# Altium PCB FRONT_v1.PcbDoc (part 2 of 5)
Units mm, origin at the board's own origin, x right, y up, seen from the top; angles counter-clockwise.
Board outline 100 x 68 mm, 4 copper layers (Top Layer, Layer 1, Layer 2, Bottom Layer), stack 1.484 mm thick; 320 components, 276 nets, 1432 pads, 1421 vias.
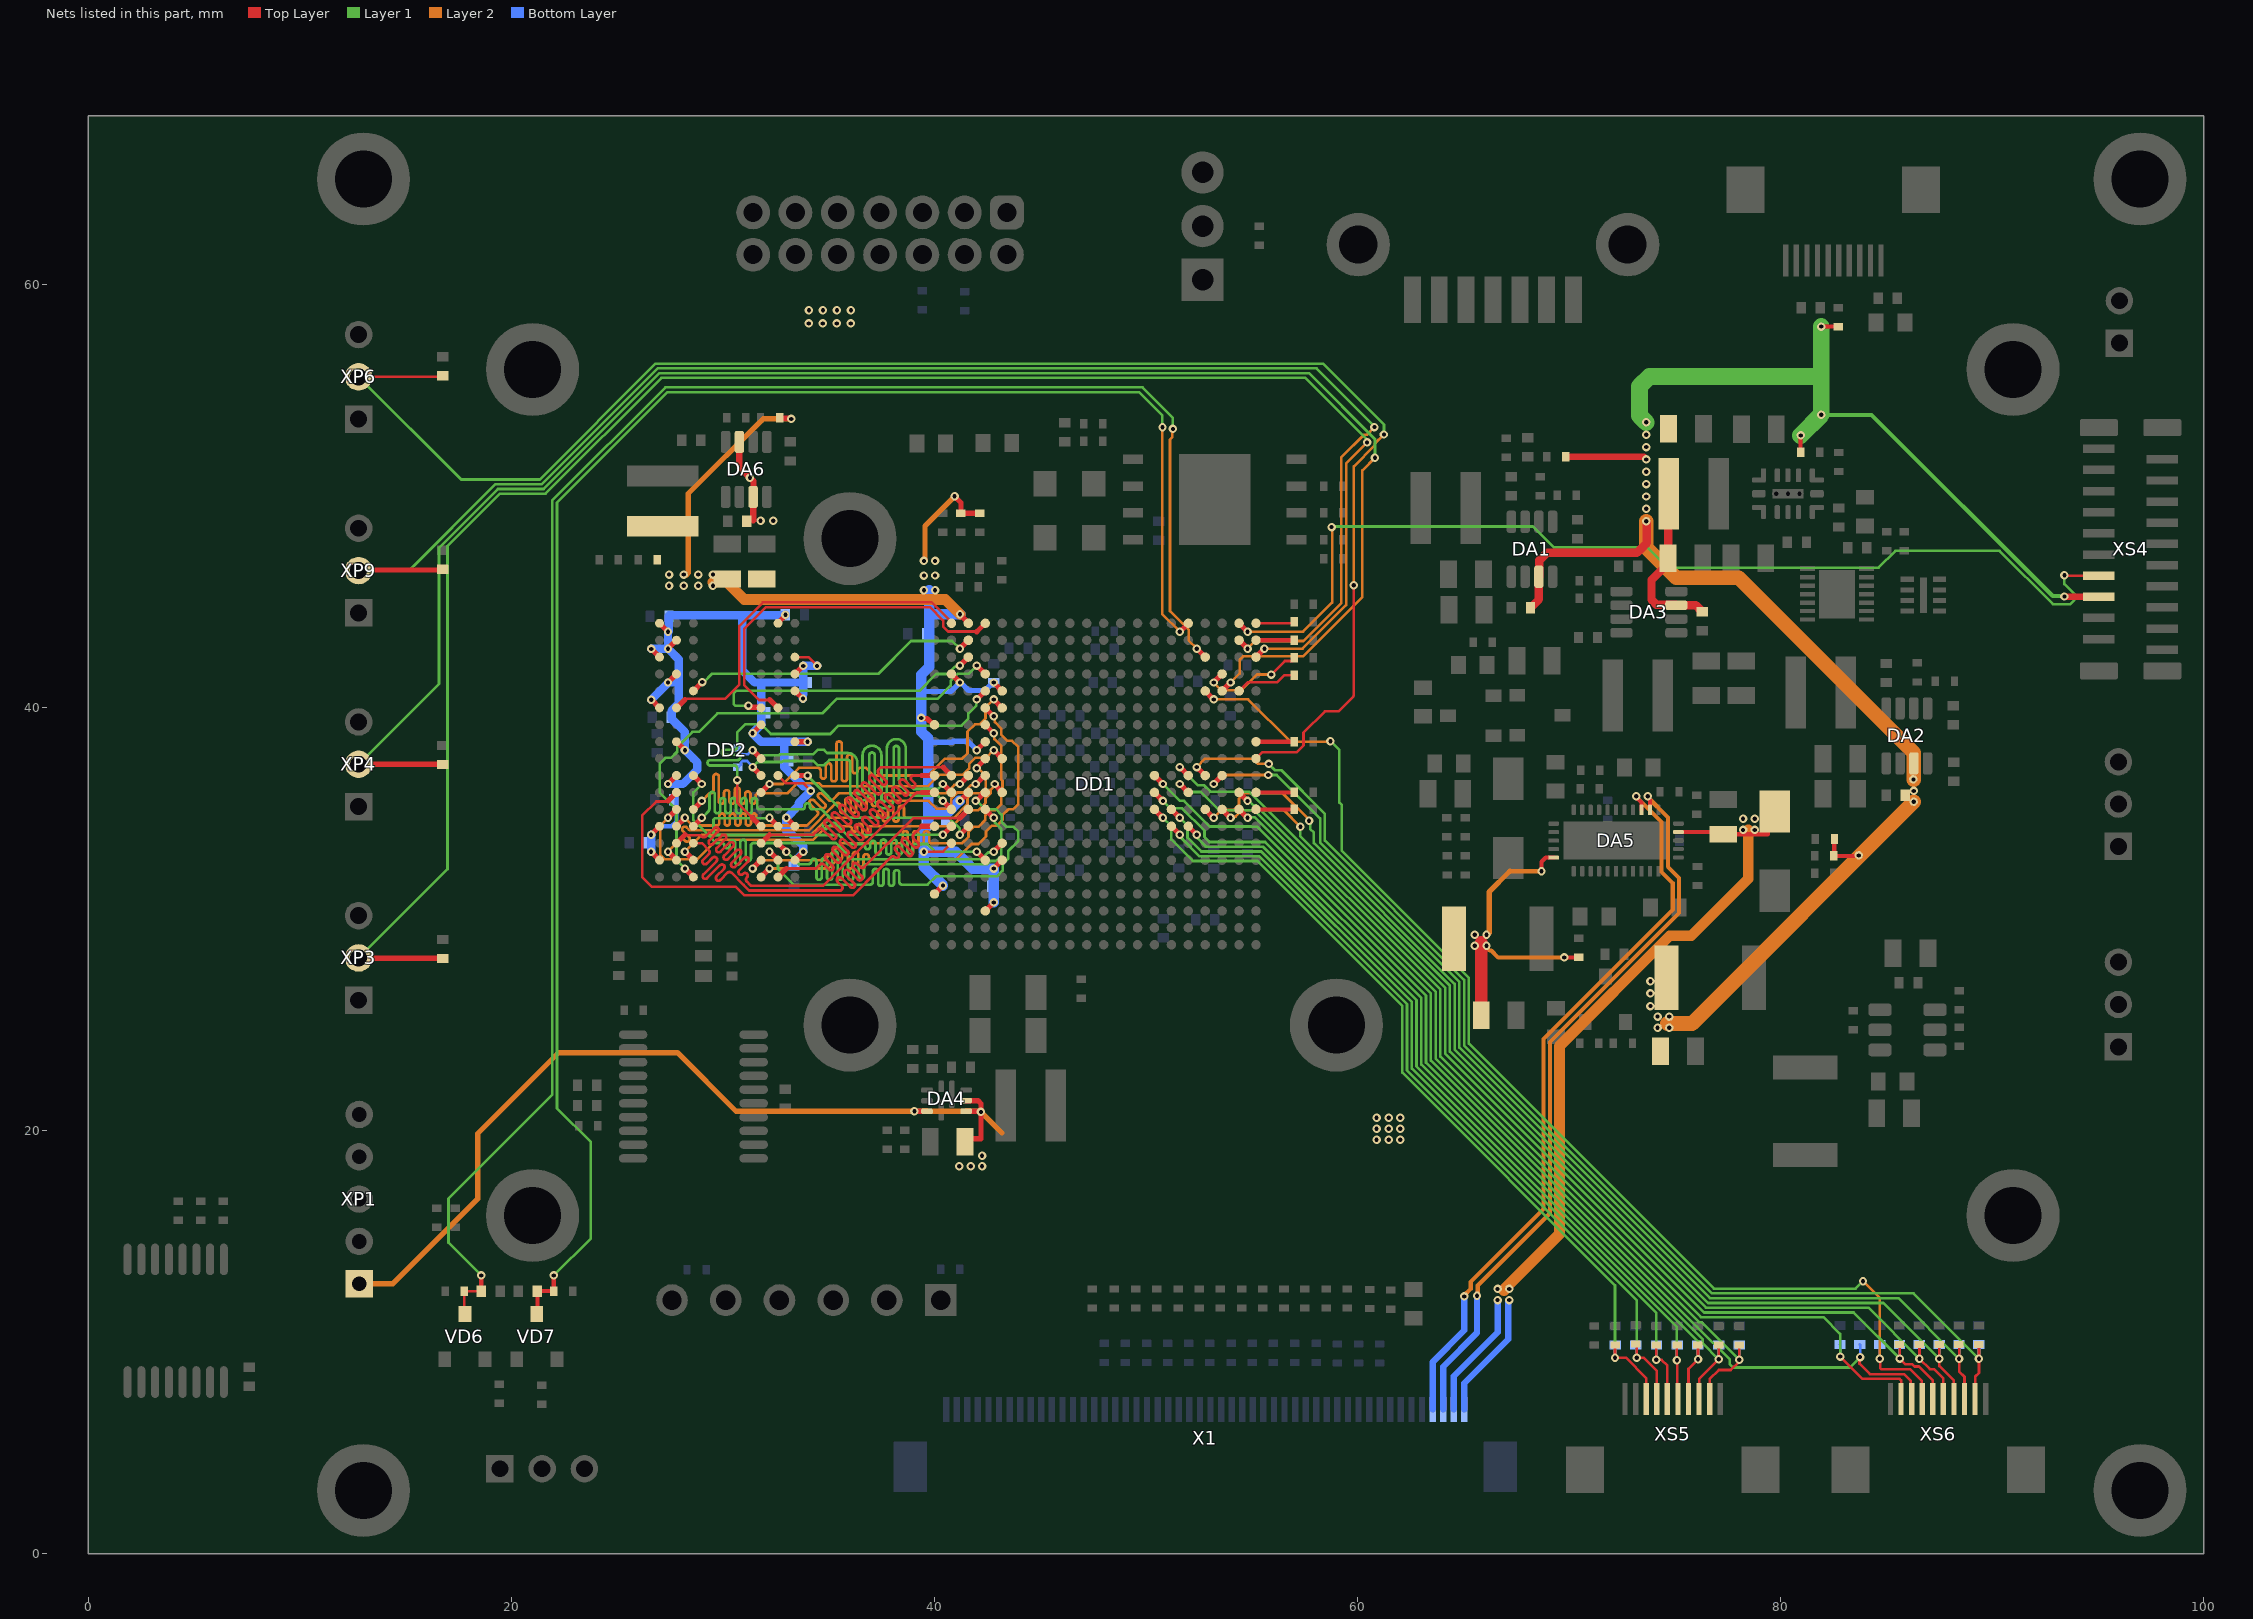
[diagram p4: the nets of this part, all layers, seen from the top]

## Footprints (in the part's own frame and the unit in brackets; to place one, negate y for a bottom-side part, rotate by r counter-clockwise, add the part's x,y. Pads: shape width x height; smd on the part's side, far side on the other; paste and mask are expansions set on the pad) (continued)
SOT95P280X145-6L [mm] "SOT23, 6-Leads, Body 2,90x2,80mm, Pitch 0,95mm, IPC High Density"
  rrect50% 1.1x0.6 smd: 1(-1.3,0.95) 2(-1.3,0) 3(-1.3,-0.95) 4(1.3,-0.95) 5(1.3,0) 6(1.3,0.95)
  silkscreen extent -1.4,-1.55 0.5,1.9, body extent -1.5,-1.53 1.5,1.53, height 1.45
TSOP65P280X110-8L [mm] "TSOP, 8-Leads, Body 2,90x1,60mm, Pitch 0,65mm, IPC High Density"
  rrect50% 1.05x0.45 smd mask+0.05: 1(-1.3,0.975) 2(-1.3,0.325) 3(-1.3,-0.325) 4(-1.3,-0.975) 5(1.3,-0.975) 6(1.3,-0.325) 7(1.3,0.325) 8(1.3,0.975)
  silkscreen extent -0.45,-1.5 0.45,1.5, body extent -1.4,-1.5 1.4,1.5, height 1.1
TSOP65P640X120-16N [mm] "TSOP, 16-Leads, Body 5,00x4,40mm, Pitch 0,65mm, IPC Medium Density"
  oval 1.5x0.38 smd mask+0.05: 1(-2.9,2.275) 2(-2.9,1.625) 3(-2.9,0.975) 4(-2.9,0.325) 5(-2.9,-0.325) 6(-2.9,-0.975) 7(-2.9,-1.625) 8(-2.9,-2.275) 9(2.9,-2.275) 10(2.9,-1.625) 11(2.9,-0.975) 12(2.9,-0.325) 13(2.9,0.325) 14(2.9,0.975) 15(2.9,1.625) 16(2.9,2.275)
  silkscreen extent -3.75,-2.55 1.85,3.15, body extent -3.2,-2.55 3.2,2.55, height 1.2
TSOP65P640X120-20L [mm] "TSOP, 20-Leads, Body 6,50x4,40mm, Pitch 0,65mm, IPC High Density"
  oval 1.35x0.4 smd mask+0.05: 1(-2.85,2.925) 2(-2.85,2.275) 3(-2.85,1.625) 4(-2.85,0.975) 5(-2.85,0.325) 6(-2.85,-0.325) 7(-2.85,-0.975) 8(-2.85,-1.625) 9(-2.85,-2.275) 10(-2.85,-2.925) 11(2.85,-2.925) 12(2.85,-2.275) 13(2.85,-1.625) 14(2.85,-0.975) 15(2.85,-0.325) 16(2.85,0.325) 17(2.85,0.975) 18(2.85,1.625) 19(2.85,2.275) 20(2.85,2.925)
  silkscreen extent -2.97,-3.3 1.85,3.8, body extent -3.2,-3.3 3.2,3.3, height 1.2
"VQFN-HR 9" [mm] "PQFN, 10-Leads, Body 2,00x1,50mm, Pitch 0,50mm, IPC Medium Density"
  rrect50% 0.55x0.25 smd mask+0.05: 1(-0.925,0.5) 2(-0.925,0) 3(-0.925,-0.5) 5(0.925,-0.5) 6(0.925,0) 7(0.925,0.5)
  rrect50% 0.25x1 smd mask+0.05: 4(-0.25,-0.45)
  rrect50% 0.25x1.3 smd mask+0.05: 8(0.25,0.3)
  rrect50% 0.25x0.55 smd mask+0.05: 9(-0.25,0.675)
  silkscreen extent -1.6,-0.8 1.05,0.85, body extent -1.01,-0.76 1.01,0.76, height 1
"WB-02 (MW-2M) PITCH 2.00MM" [mm]
  rect 1.3x1.3 hole 0.8: 1(0,0)
  round 1.3 hole 0.8: 2(2,0)
  silkscreen extent -2.1,-3 4.1,1.9, body extent -2,-2.9 4,1.75, height 6.12
"WB-03 (MW-3M) PITCH 2.00MM" [mm]
  rect 1.3x1.3 hole 0.8: 1(0,0)
  round 1.3 hole 0.8: 2(2,0) 3(4,0)
  silkscreen extent -2.29,-3.05 6.22,2.03, body extent -1.98,-2.76 5.92,1.74, height 6
"WB-05 (MW-5M) PITCH 2.00MM" [mm]
  rect 1.3x1.3 hole 0.7: 1(0,0)
  round 1.3 hole 0.7: 2(2,0) 3(4,0) 4(6,0) 5(8,0)
  silkscreen extent -2.29,-3.05 10.29,2.03, body extent -1.95,-2.75 9.95,1.75, height 6
WQFN-13 [mm] "3.00 mm × 2.00 mm"
  rrect50% 0.65x0.25 smd mask+0.05: 1(-0.87,1.15) 2(-0.87,0.5) 3(-0.87,0) 4(-0.87,-0.5) 5(-0.875,-1.155) 7(0.87,-1.155) 8(0.87,-0.5) 9(0.87,0) 10(0.87,0.5) 11(0.875,1.155)
  rrect50% 0.25x0.65 smd mask+0.05: 1(-0.65,1.375) 5(-0.65,-1.375) 7(0.65,-1.38) 11(0.65,1.375)
  rrect50% 0.35x0.65 smd mask+0.05: 6(0,-1.375) 12(0,1.375)
  round 0.4 hole 0.2 mask+0.05: 13(0,0.55) 13(0,0) 13(0,-0.55)
  rect 0.45x1.45 smd mask+0.05: 13(0,0)
  silkscreen extent -1.62,1.87 -1.38,2.12, body extent -1,-1.5 1,1.5, height 0.7
XTAL_ASFLMB-33.333MHZ-LC-T [mm]
  rect 1.1x1.2 smd: 1(-1.15,1.27) 2(-1.15,-1.27) 3(1.15,-1.27) 4(1.15,1.27)
  silkscreen extent -2.35,-2.5 1.6,2.5, body extent -1.6,-2.47 1.6,2.53, height 0.86

## Part data
C1 C2 C6 C7 C11 C12 C13 C17 C18 C19 C20 C21 C22 C23 C24 C30 C31 C32 C33 C34 C35 C36 C37 C38 C39 C40 C41 C42 C43 C44 C45 C46 C47 C48 C49 C50 C51 C52 C53 C62 C66 C69 C70 C71 C72 C73 C74 C75 C76 C77 C78 C79 C80 C81 C82 C83 C84 C85 C86 C87 C88 C92 C93 C94 C95 C96 C97 C98 C99 C100 C101 C102 C114 C115 C116 C117 C118 C119 C120 C121 C122 C123 C124 C127 C128 C129 C130 C131 C132 C134 C135 C136 C137 C138 C139 C140 C141 C142 C143: "ЧИП конденсатор", Manufacturer=Yageo, Tolerance=10%, Voltage=10В
  C1 C2 C6 C7 C11 C12 C13 C17 C18 C20 C21 C22 C23 C24 C30 C31 C32 C33 C34 C35 C36 C37 C38 C39 C40 C41 C42 C43 C44 C45 C47 C48 C50 C53 C62 C66 C69 C70 C71 C72 C73 C74 C75 C76 C77 C78 C79 C80 C81 C82 C83 C84 C85 C86 C87 C88 C92 C93 C102 C134 C135 C136 C137 C138 C139 C140 C141 C142: ID="0402 0,1 мкФ 10В X7R", ManufacturerPartNumber=CC0402KRX5R6BB104, Nominal="0,1 мк", RuNominal="0,1 мкФ", TYPE=X7R
  C19: ID="0603 4,7 мкФ 10В X5R", ManufacturerPartNumber=CC0603KRX5R6BB475, Nominal=4,7мк, RuNominal="4,7 мкФ", TYPE=X5R
  C46 C49 C51 C52 C94 C95 C96 C97 C98 C99 C100 C101 C114 C115 C116 C117 C118 C119 C120 C121 C122 C123 C124 C127 C128 C129 C130 C131 C132 C143: ID="0402 0,1 мкФ 10В X7R", ManufacturerPartNumber=CC0402KRX5R6BB104, Nominal=0,1мк, RuNominal="0,1 мкФ", TYPE=X7R
C3 C8 C14 C27 C54 C57 C58 C59 C60 C61 C63 C65 C89 C110: "ЧИП конденсатор", Manufacturer=Yageo, Tolerance=10%, Voltage=50В, TYPE=X7R
  C3 C8 C14 C89: ID="0402 8,2 нФ 50В X7R", ManufacturerPartNumber=CC0402KRX7R9BB822, Nominal=8,2нФ, RuNominal="8,2 нФ"
  C27: ID="0402 10 нФ 50В X7R", ManufacturerPartNumber=CC0402KRX7R9BB103, Nominal="0,01 мк", RuNominal="10 нФ"
  C54 C57 C59 C61 C63: ID="0603 1 мкФ 50В X7R", ManufacturerPartNumber=CC0603KRX7R9BB105, Nominal=1мк, RuNominal="1 мкФ"
  C58 C60 C65 C110: ID="0603 0,1 мкФ 50В X7R", ManufacturerPartNumber=CC0603KRX7R9BB103, Nominal=0,1мк, RuNominal="0,1 мкФ"
C4 C5 C9 C10 C15 C16 C90 C91 C106 C107: "ЧИП конденсатор", Manufacturer=Yageo, Tolerance=0,2, Voltage=6,3В, ID="0805 22 мкФ 6,3В X5R", ManufacturerPartNumber=CC0805MKX5R5BB226, Nominal=22мк, RuNominal="22 мкФ", TYPE=X5R
C25 C55 C56 C64 C67 C68 C113: "ЧИП конденсатор", Manufacturer=Yageo, Tolerance=0,1, Voltage=25В, TYPE=X7R
  C25 C55 C56 C64 C113: ID="0805 10 мкФ 25В X7R", ManufacturerPartNumber=CC0805KKX5R8BB106, Nominal=10мк, RuNominal="10 мкФ"
  C67 C68: ID="0805 4,7 мкФ 25В X7R", ManufacturerPartNumber=CC0805KKX7R8BB475, Nominal=4,7мк, RuNominal="4,7 мкФ"
C26 C105: "ЧИП конденсатор", Manufacturer=Yageo, Tolerance=10%, Voltage=6,3В, ID="0402 1 мкФ 6,3В X5R", ManufacturerPartNumber=CC0402KRX5R5BB105, Nominal=1мк, RuNominal="1 мкФ", TYPE=X5R
C28 C29: "ЧИП конденсатор", Manufacturer=Yageo, Tolerance=20%, Voltage=6,3В, ID="1206 100 мкФ 6,3В X5R", ManufacturerPartNumber=CC1206MKX5R5BB107, Nominal=100мк, RuNominal="100 мкФ", TYPE=X5R
C103 C104 C111: "ЧИП конденсатор", Manufacturer=Yageo, Tolerance=0,1, Voltage=50В, ID="0805 1 мкФ 50В X7R", ManufacturerPartNumber=CC0805KKX7R9BB105, Nominal=1мк, RuNominal="1 мкФ", TYPE=X7R
C108 C109: library part C0402C102J5GACTU, "ЧИП конденсатор", Manufacturer=Yageo, Tolerance=5%, Voltage=50В, ID="0402 1 нФ 50В C0G", ManufacturerPartNumber=C0402C102J5GACTU, Nominal="1 нФ", RuNominal="1 нФ", TYPE=C0G
C112 C125 C126: "ЧИП конденсатор", Manufacturer=Yageo, Tolerance=5%, Voltage=50В, ID="0402 1 нФ 50В C0G", ManufacturerPartNumber=C0402C102J5GACTU, Nominal=1н, RuNominal="1 нФ", TYPE=C0G
DA1 DA2 DA3 DA6: "TPS56x210A, 4.5-V to 17-V Input, 2-A, 3-A Synchrono", Manufacturer=TI, ComponentLink1Description=datasheet, ComponentLink1URL=https://www.ti.com/lit/ds/symlink/tps563210a.pdf?ts=1769179342855&ref_url=https%253A%252F%252Fwww.ti.com%252Fproduct%252FTPS563210A, ManufacturerPartNumber=TPS563210A
DA4: "3-V to 18-V Input, 6-A Synchronous Step-Down Voltage Regulator", ComponentLink1Description=datasheet, ComponentLink1URL=https://www.ti.com/lit/ds/symlink/tps566231.pdf?ts=1764277568408
DA5: "LCD Bias Power Integrated with WLED Backlight Drivers", Manufacturer=TI, ComponentLink1Description=datasheet, ComponentLink1URL=https://www.ti.com/lit/ds/symlink/tps65142.pdf?ts=1769084662005&ref_url=https%253A%252F%252Fwww.ti.com%252Fproduct%252FTPS65142, ManufacturerPartNumber=TPS65142RTGR
DA7: "3.8-V to 36-V, 4-A Ultra-Small Synchronous Step-Down Converter", Manufacturer=TI, ComponentLink1Description=datasheet, ComponentLink1URL=https://www.ti.com/lit/ds/symlink/lm60440.pdf?HQS=dis-dk-null-digikeymode-dsf-pf-null-wwe&ts=1663282176250&ref_url=https%253A%252F%252Fwww.digikey.si%252F, ManufacturerPartNumber=LM60440DRPKR
DA8: "SIMPLE SWITCHER® 4-V to 36-V, 600-mA Synchronous Step-Down Converter", Manufacturer=TI, ComponentLink1Description=datasheet, ComponentLink1URL=https://www.ti.com/lit/ds/symlink/tps560430.pdf?ts=1769393151340, ManufacturerPartNumber=TPS560430
DA9: "LP5907 250mA, Low-Noise, Low-IQ LDO", Manufacturer=TI, ComponentLink1Description=datasheet, Datasheet=http://www.ti.com/lit/ds/symlink/lp5907.pdf, ID=LP5907MFX-1.2, ManufacturerPartNumber=LP5907MFX-1.2, Rem=SOT-23
DA10: "1.2V to 3.6V, 12-Bit, Nanopower, 4-Wire Micro TOUCH SCREEN CONTROLLER with I / 2C™ Interface", Manufacturer=TI, ComponentLink1Description=datasheet, ComponentLink1URL=https://static.chipdip.ru/lib/346/DOC032346667.pdf, ManufacturerPartNumber=TSC2007IPWR
DD1: "Zynq®-7000 SoC Family", Manufacturer=Xilinx, ManufacturerPartNumber=XC7Z010-2CLG400I
DD2: "4Gb, x16, 1.35V DDR3L", Manufacturer=Micron, ManufacturerPartNumber=MT41K256M16HA-125
DD3: "3V 256M-BIT SERIAL FLASH MEMORY WITH DUAL/QUAD SPI", Manufacturer=WINBOND, ManufacturerPartNumber=W25Q256JVEIQ
DD4: "Value-line Arm®-based 32-bit MCU with16 KB Flash, timers, ADC, communication interfaces, 2.4-3.6 V operation", Manufacturer=STM, ComponentLink1Description=datasheet, ComponentLink1URL=http://www.analog.com/media/en/technical-documentation/data-sheets/ADCLK944.pdf, ManufacturerPartNumber=STM32F030F4
DD5: "RS-422 Transceivers with Low-Voltage Logic Interface 16M", Manufacturer=AD, ComponentLink1Description=datasheet, ComponentLink1URL=https://static.chipdip.ru/lib/039/DOC028039660.pdf, ManufacturerPartNumber=MAX13433EETD+
G1: library part "Генератор кварцевый ASFLMB-33.333MHZ", "33.333 MHz HCMOS/TTL Clock Oscillator", Manufacturer=Abracom, ManufacturerPartNumber=ASFLMB-33.333MHZ-LC
L1 L2 L3 L9 L10: "Shielded Power Inductors", Current=2,7А, Manufacturer=Coilcraft, DC Res=19,5mOhms, ID="XGL4020 2,2мкГн", ManufacturerPartNumber=XGL4020-222ME, Nominal=2,2мкГн
L4: "Shielded Power Inductors", Current=3,8А, Manufacturer=Coilcraft, DC Res=8,2mOhms, ID="XGL4020 1мкГн", ManufacturerPartNumber=XGL4020-102ME, Nominal=1мкГн
L5 L8 L11 L13: "Chip Ferrite Beads (0603 Size)", Current=2000mA, Manufacturer=Murata, DC Res=0.05ohm, ID=BLM18PG121SN1D, ManufacturerPartNumber=BLM18PG121SN1D, Nominal=BLM18PG121SN1D, Rem="120ohm ±25%"
L6 L7 L12: "Shielded High SRF Inductors", Current=0,9А, Manufacturer=Coilcraft, DC Res=0.17, ID="1812PS 10мкГн 10%", ManufacturerPartNumber=1812PS-103KR, Nominal=10мкГн, Rem=10%
R1 R2 R3 R4 R5 R6 R7 R8 R9 R10 R11 R12 R13 R14 R15 R16 R17 R18 R19 R20 R21 R22 R23 R24 R25 R26 R27 R28 R29 R30 R31 R32 R33 R34 R35 R36 R37 R38 R39 R40 R41 R42 R43 R44 R45 R46 R47 R48 R49 R50 R51 R52 R53 R54 R55 R56 R57 R58 R59 R60 R62 R63 R64 R65 R66 R67 R69 R70 R71 R72 R73 R75 R77 R78 R79 R80 R81 R82 R83 R84 R85 R86 R87 R88 R89 R90 R91 R92 R93 R94 R95 R96 R97 R98 R99 R100 R101 R102 R103 R104 R105 R106 R107 R108 R109 R110 R111 R112 R113 R114 R115 R117 R118 R119 R120 R121 R122 R123 R124: "ЧИП резистор", Manufacturer=Yageo, Tolerance=5%
  R1 R3 R5 R11 R12 R20 R48 R49 R77 R78 R79 R80 R81 R82 R83 R84 R94 R99 R100 R101 R102 R104 R105 R107 R108 R110 R111 R112 R113 R114 R115 R117: ID="0402 10 кОм 5%", ManufacturerPartNumber=RC0402JR-0710KL, Nominal=10к
  R2 R46: ID="0402 33 кОм 5%", ManufacturerPartNumber=RC0402JR-0733KL, Nominal=33к
  R4 R98: ID="0402 22 кОм 5%", ManufacturerPartNumber=RC0402JR-0722KL, Nominal=22к
  R6 R36: ID="0402 27 кОм 5%", ManufacturerPartNumber=RC0402JR-0727KL, Nominal=27к
  R7 R92: ID="0402 100 кОм 5%", ManufacturerPartNumber=RC0402JR-07100KL, Nominal=100к
  R8 R9 R85 R86 R87 R88 R89 R90 R91: ID="0402 20 кОм 5%", ManufacturerPartNumber=RC0402JR-0720KL, Nominal=20к
  R10: ID="0402 30 кОм 5%", ManufacturerPartNumber=RC0402JR-0730KL, Nominal=30к
  R13 R14 R15 R16 R17 R120 R121: ID="0402 1 Ом 5%", ManufacturerPartNumber=RC0402JR-071RL, Nominal=1
  R18 R19: ID="0402 180 кОм 5%", ManufacturerPartNumber=RC0402JR-07180KL, Nominal=180к
  R21 R95 R96 R103 R106 R109 R118 R119: ID="0402 100 Ом 5%", ManufacturerPartNumber=RC0402JR-07100RL, Nominal=100
  R22: ID="0402 240 кОм 5%", ManufacturerPartNumber=RC0402JR-07240KL, Nominal=240к
  R23 R24 R26 R29 R31 R34 R35 R37 R38 R40 R41 R42 R44 R45 R47 R50 R53 R54 R55 R56 R57 R58 R59 R60 R62 R63 R64 R65 R66: ID="0402 22 Ом 5%", ManufacturerPartNumber=RC0402JR-0722RL, Nominal=22
  R25: ID="0402 120 кОм 5%", ManufacturerPartNumber=RC0402JR-07120KL, Nominal=120к
  R27: ID="0402 130 кОм 5%", ManufacturerPartNumber=RC0402JR-07130KL, Nominal=130к
  R28: ID="0402 10 Ом 5%", ManufacturerPartNumber=RC0402JR-0710RL, Nominal=10
  R30 R33 R39: ID="0402 18 кОм 5%", ManufacturerPartNumber=RC0402JR-0718KL, Nominal=18к
  R32: ID="0402 68 кОм 5%", ManufacturerPartNumber=RC0402JR-0768KL, Nominal=68к
  R43 R67 R69 R73 R75: ID="0402 1 кОм 5%", ManufacturerPartNumber=RC0402JR-071KL, Nominal=1к
  R51: ID="0402 110 кОм 5%", ManufacturerPartNumber=RC0402JR-07110KL, Nominal=110к
  R52: ID="0402 51 Ом 5%", ManufacturerPartNumber=RC0402JR-0751RL, Nominal=51
  R70: ID="0402 240 Ом 5%", ManufacturerPartNumber=RC0402JR-07240RL, Nominal=240
  R71: ID="0402 9,1 кОм 5%", ManufacturerPartNumber=RC0402JR-079K1L, Nominal=9,1к
  R72: ID="0402 12 кОм 5%", ManufacturerPartNumber=RC0402JR-0712KL, Nominal=12к
  R93: ID="0402 24 кОм 5%", ManufacturerPartNumber=RC0402JR-0724KL, Nominal=24к
  R97: ID="0402 51 кОм 5%", ManufacturerPartNumber=RC0402JR-0751KL, Nominal=51к
  R122 R123 R124: ID="0402 4,7 кОм 5%", ManufacturerPartNumber=RC0402JR-074K7L, Nominal=4,7к
R61 R68 R74 R76: "ЧИП резистор", Manufacturer=Yageo, Tolerance=1%
  R61: ID="0402 61,9 кОм 1%", ManufacturerPartNumber=RC0402FR-0761K9L, Nominal=61,9к
  R68 R74 R76: ID="0402 80,6 Ом 1%", ManufacturerPartNumber=RC0402FR-0780R6L, Nominal=80,6
VD1 VD3 VD4 VD6 VD7: "SCHOTTKY DIODE", Manufacturer="International Rectifier", Datasheet=https://static.chipdip.ru/lib/196/DOC000196695.pdf, ID=BAT54S, ManufacturerPartNumber=BAT54S, Rem="0.2Amp 30V"
VD2 VD5: "High-Current Density Surface Mount Schottky Rectifier", Manufacturer=Vishay, Datasheet=https://static.chipdip.ru/lib/652/DOC001652710.pdf, ID=B340A, ManufacturerPartNumber=B340A, Rem="3Amp 40V"
XP1: "WB-05 (MW-5M) pitch 2.00mm / DS1066-05M", ManufacturerPartNumber=WB-05
XP3 XP4 XP6 XP8 XP9 XP13 XP14: "WB-03(MW-3M) pitch 2.00mm / DS1066-03M"
XP5: "WB-02 (MW-2M) pitch 2.00mm / DS1066-02M", ManufacturerPartNumber=WB-02
XP12: library part "STM32 S-LINK PLS-6"
XS1: library part "SATA KLS1-SATA001", "SATA Type A 7P Male Connector,SMD"
XS2: library part "JTAG Xilinx IDC2-14MS"
XS3 XS5 XS6: Manufacturer=Hirose, ManufacturerPartNumber=FH12-10S-0.5SVA
XS4: "FPC Connectors, Flex-to-Board, 20 Position, .5mm [.02in]", Manufacturer=Hirose, ManufacturerPartNumber=FH12-20S-0.5SVA
Z1: "ESD-EMI 4-line Protection for Color LCD Interfaces", Manufacturer=SEMTECH, ManufacturerPartNumber=ECLAMP2394P, ComponentLink1Description=datasheet, ComponentLink1URL=https://semtech.my.salesforce.com/sfc/p/#E0000000JelG/a/44000000MCQv/tLOuuaZwODheyCzafOGtui7bNA1cSjYbUE_tOk41Kw4

## Free pads (board coordinates)
  round 4.4 hole 2.7: 1(13,3) 1(13,65) 1(21,16) 1(21,56) 1(36,25) 1(36,48) 1(59,25) 1(91,16) 1(91,56) 1(97,3) 1(97,65)

## Via types
v1: diameter 0.4, hole 0.2, Top Layer to Bottom Layer, tented both sides, 837 vias
v2: diameter 0.8, hole 0.4, Top Layer to Bottom Layer, tented both sides, 558 vias
v3: diameter 0.8, hole 0.4, Top Layer to Bottom Layer, 12 vias
v4: diameter 0.5, hole 0.3, Top Layer to Bottom Layer, 10 vias
v5: diameter 0.5, hole 0.2, Top Layer to Bottom Layer, 4 vias

## Nets (pads, with @x,y where several pads share a name; then routed paths per layer and width w, separated by ;. In a path a pad name is that pad's centre, name@x,y a point inside that pad or via, vN(x,y) a via of type N, cw(c..) or ccw(c..) an arc to the next point about the centre after c; other vN are vias at no path point)
ADC0_N: DD1.B20 R13.2 | length 1.8
  Top Layer w0.2: DD1.B20@55.2,43.2 R13.2@57,43.2
ADC0_P: C47.2 DD1.C20 XP3.2 | length 86.7
  Top Layer w0.25: XP3.2@12.775,28.175 12.788,28.162 16.738,28.162 C47.2@16.75,28.15 ; DD1.C20@55.2,42.4 v1(55.6,42.8)
  Layer 1 w0.125: XP3.2@12.775,28.175 16.975,32.375 16.975,47.65 19.45,50.125 21.618,50.125 27.094,55.6 57.53,55.6 60.397,52.733 60.397,52.603 v1(60.45,52.55)
  Layer 2 w0.125: v1(55.6,42.8) 57.4,42.8 59.462,44.862 59.462,51.562 v1(60.45,52.55)
ADC1_N: DD1.H20 R14.2 | length 1.8
  Top Layer w0.2: DD1.H20@55.2,38.4 R14.2@57,38.4
ADC1_P: C50.2 DD1.J20 XP6.2 | length 77.6
  Top Layer w0.125: XP6.2@12.775,55.65 16.7,55.65 C50.2@16.75,55.7 ; DD1.J20@55.2,37.6 55.494,37.894 57.125,37.894 57.45,38.219 57.45,38.825 58.463,39.838 59.107,39.838 59.791,40.521 59.791,40.541 59.825,40.575 v1(59.825,45.8)
  Layer 1 w0.125: XP6.2@12.775,55.65 17.625,50.8 21.339,50.8 26.814,56.275 58.375,56.275 61.25,53.4 v1(61.25,52.925)
  Layer 2 w0.125: v1(59.825,45.8) 59.825,51.412 60.813,52.4 60.813,52.488 v1(61.25,52.925)
ADC2_N: DD1.A20 R15.2 | length 1.8
  Top Layer w0.125: DD1.A20@55.2,44 56.925,44 R15.2@57,44.075
ADC2_P: C53.2 DD1.B19 XP9.2 | length 72.1
  Top Layer w0.25: XP9.2@12.775,46.492 12.804,46.521 16.721,46.521 C53.2@16.75,46.55 ; DD1.B19@54.4,43.2 v1(54.8,42.8)
  Layer 1 w0.125: XP9.2@12.775,46.492 15.167,46.492 19.25,50.575 21.432,50.575 26.907,56.05 58.058,56.05 60.8,53.309 v1(60.8,53.275)
  Layer 2 w0.125: v1(54.8,42.8) 55.162,43.162 57.444,43.162 59.237,44.956 59.237,51.85 60.3,52.913 60.438,52.913 v1(60.8,53.275)
ADC3_N: DD1.E19 R16.2 | length 2.9
  Top Layer w0.125: DD1.E19@54.4,40.8 54.812,41.212 56.212,41.212 56.55,41.55 R16.2@57,41.55
ADC3_P: C48.2 DD1.E18 XP4.2 | length 81.3
  Top Layer w0.25: XP4.2@12.775,37.333 12.779,37.329 16.746,37.329 C48.2@16.75,37.325 ; DD1.E18@53.6,40.8 v1(54,41.2)
  Layer 1 w0.125: XP4.2@12.775,37.333 16.575,41.133 16.575,47.568 19.357,50.35 21.525,50.35 27,55.825 57.7,55.825 60.825,52.7 v1(60.825,51.825)
  Layer 2 w0.125: v1(54,41.2) 54.425,41.625 54.425,42.275 54.587,42.437 57.432,42.437 60.225,45.23 60.225,51.225 v1(60.825,51.825)
ADC_BAND0: C128.1 DD1.L19 XS6.2 | length 46.8
  Top Layer w0.125: v1(82.822,9.329) 83.878,8.273 85.627,8.273 85.7,8.2 XS6.2@85.7,7.325
  Top Layer w0.25: DD1.L19@54.4,36 54.4,35.998 v1(54.798,35.598) v1(54.798,35.598)
  Layer 1 w0.125: v1(54.798,35.598) 54.873,35.598 55.083,35.388 55.203,35.388 63.916,26.675 63.916,23.507 76.233,11.19 82.035,11.19 82.822,10.403 v1(82.822,9.329)
  Bottom Layer w0.125: C128.1@82.813,9.9 82.822,9.891 v1(82.822,9.329)
ADC_BAND0N: DD1.L20 R121.2 | length 1.8
  Top Layer w0.2: DD1.L20@55.2,36 R121.2@57,36
ADC_BAND1: C131.1 DD1.M19 XS6.3 | length 47.1
  Top Layer w0.125: v1(83.762,9.306) 83.733,9.277 83.733,8.992 84.227,8.498 85.839,8.498 86.161,8.176 86.161,7.364 XS6.3@86.2,7.325
  Top Layer w0.25: DD1.M19@54.4,35.2 v1(54.8,34.8)
  Layer 1 w0.125: v1(54.8,34.8) 54.835,34.835 55.119,34.835 63.466,26.488 63.466,23.32 76.056,10.731 76.057,10.731 77.601,9.187 77.601,8.964 77.752,8.812 83.284,8.812 83.762,9.29 v1(83.762,9.306)
  Bottom Layer w0.125: C131.1@83.75,9.9 83.762,9.888 v1(83.762,9.306)
ADC_BAND1N: DD1.M20 R120.2 | length 1.8
  Top Layer w0.2: DD1.M20@55.2,35.2 R120.2@57,35.2
ADC_BAND2: C51.1 DD1.E17 XS6.4 | length 55.7
  Top Layer w0.125: v1(84.695,9.225) 84.713,9.207 84.713,8.796 84.786,8.723 86.14,8.723 86.674,8.189 86.674,7.351 XS6.4@86.7,7.325
  Top Layer w0.25: DD1.E17@52.8,40.8 v1(53.2,40.4)
  Layer 1 w0.125: v1(58.718,38.425) 59.137,38.005 59.137,35.525 59.257,35.405 59.257,33.243 65.266,27.234 65.266,24.124 76.851,12.54 83.547,12.54 v1(83.9,12.893)
  Layer 2 w0.125: v1(53.2,40.4) 54.825,40.4 56.825,38.4 58.693,38.4 v1(58.718,38.425) ; v1@83.908,12.893 84.695,12.106 v1(84.695,9.225)
  Bottom Layer w0.125: C51.1@84.688,9.9 84.695,9.893 v1(84.695,9.225)
ADC_BAND2N: DD1.D18 R17.2 | length 5.2
  Top Layer w0.125: v1(55.925,41.575) 56.563,42.213 56.887,42.213 57,42.325 R17.2@57,42.375
  Top Layer w0.25: v1(53.2,41.2) DD1.D18@53.6,41.6
  Layer 2 w0.125: v1(53.2,41.2) 53.575,40.825 54.5,40.825 55.25,41.575 v1(55.925,41.575)
BL_A: C68.2 DA5.15 VD5.1 X1.1 X1.2 | length 44.7
  Top Layer w0.2: DA5.15@75.175,34.125 77.2,34.125 C68.2@77.3,34.025 79.4,34.025 79.4,34.775 VD5.1@79.725,35.1
  Layer 2 w0.5: 66.925,12.45 66.975,12.5 66.975,12.55 69.55,15.125 69.55,24.014 74.761,29.225 75.776,29.225 78.475,31.924 78.475,34.227
  Bottom Layer w0.3: X1.2@64.55,6.825 64.55,8.4 66.625,10.475 v1(66.625,12) ; X1.1@65.05,6.825 65.05,8.075 67.125,10.15 v1@67.125,12
  other v1: 67.175,12 66.625,12.525 67.175,12.525 78.227,34.227 78.777,34.227 78.227,34.752 78.777,34.752
BL_K1: DA5.18 X1.3 | length 34.9
  Top Layer w0.2: v1(73.725,35.825) 73.725,35.771 73.825,35.671 DA5.18@73.825,35.175
  Layer 2 w0.2: v1(65.65,12.2) 65.688,12.238 65.688,12.692 69.1,16.104 69.1,24.2 75.2,30.3 75.2,31.959 74.675,32.484 74.675,34.821 73.725,35.771 v1(73.725,35.825)
  Bottom Layer w0.3: X1.3@64.05,6.825 64.05,8.85 65.65,10.45 v1(65.65,12.2)
BL_K2: DA5.19 X1.4 | length 35.2
  Top Layer w0.2: v1(73.175,35.825) 73.175,35.771 73.425,35.521 DA5.19@73.425,35.175
  Layer 2 w0.2: v1(65.05,12.175) 65.05,12.229 65.35,12.529 65.35,12.853 68.8,16.303 68.8,24.35 74.9,30.45 74.9,31.716 74.378,32.237 74.378,32.357 74.375,32.36 74.375,34.609 73.175,35.809 v1(73.175,35.825)
  Bottom Layer w0.3: X1.4@63.55,6.825 63.55,9.075 65.05,10.575 v1(65.05,12.175)
BL_PWR: C2.2 C7.2 C13.2 C25.2 C64.1 C67.2 C88.2 C106.2 C107.2 DA1.3 DA2.3 DA3.3 DA4.3 DA4.5 DA4.6 DA5.32 DA6.3 DA6.7 L6.2 L7.2 L10.1 R1.1 R28.1 R36.1 R52.1 R92.1 R95.1 XP1.1 XS4.6 | length 153.3
  Top Layer w0.2: v1(68.7,32.275) 68.7,32.725 68.9,32.925 DA5.32@69.275,32.925 ; v1(69.775,28.2) R28.1@70.45,28.2 ; R92.1@80.95,52.075 v1@80.95,52.875 ; v1(81.925,58.025) R95.1@82.725,58.025 ; R36.1@82.55,33.025 R36.1@82.537,33.012 ; R52.1@82.55,33.8 82.537,33.787 R36.1@82.537,33.012 ; v1(83.7,33.025) 83.675,33 R36.1@82.525,33 R36.1@82.537,33.012
  Top Layer w0.25: v1(39.05,20.925) 39.054,20.929 DA4.3@39.645,20.929 ; C25.2@41.45,19.475 41.596,19.621 42.2,19.621 v1@42.2,20.9 ; DA4.5@41.495,20.929 42.171,20.929 v1@42.2,20.9 ; DA4.6@41.495,21.429 42.054,21.429 42.2,21.282 v1@42.2,20.9
  Top Layer w0.3: DA6.7@30.775,52.575 30.775,51.375 v1(31.275,50.875) 31.44,50.71 31.44,49.99 DA6.3@31.425,49.975 31.425,48.875 ; R1.1@69.85,51.875 73.547,51.875 v1@73.675,51.747 ; v1@93.425,45.25 XS4.6@95.05,45.25
  Top Layer w0.4: C2.2@68.175,44.725 68.175,44.775 68.195,44.795 68.245,44.795 68.575,45.125 DA1.3@68.575,46.2 68.6,46.225 68.6,46.975 68.95,47.325 73.2,47.325 73.675,47.8 v1@73.675,48.8 ; L10.1@74.695,50.105 74.695,47.095 C106.2@74.675,47.075 74.675,46.825 73.9,46.05 73.9,45.109 74.134,44.875 75.05,44.875 DA3.3@75.075,44.85 75.996,44.85 76.23,44.616 76.23,44.57 76.25,44.55 C13.2@76.3,44.55
  Top Layer w0.6: C64.1@65.85,25.475 65.85,28.925
  Layer 1 w0.2: v1@81.925,53.853 84.305,53.853 92.87,45.287 v1@93.401,45.287
  Layer 1 w0.8: v1(73.65,53.5) 73.339,53.811 73.339,55.205 73.808,55.674 81.925,55.674 ; v1(80.952,52.88) 80.952,52.882 v1(81.927,53.857) 81.925,53.859 81.925,55.674 ; v1(81.925,58.025) 81.925,55.674
  Layer 2 w0.2: v1@66.099,28.676 66.249,28.526 66.324,28.526 66.65,28.2 v1(69.775,28.2) ; 67.2,32.275 v1(68.7,32.275) ; v1@93.401,45.287 v1(93.423,45.265)
  Layer 2 w0.25: XP1.1@12.8,12.775 14.4,12.775 18.4,16.775 18.4,19.865 22.235,23.7 27.85,23.7 30.625,20.925 v1(39.05,20.925) v1@42.2,20.925 ; v1(42.196,20.896) 43.175,19.917 ; v1(66.099,29.276) 66.148,29.276 66.224,29.351 66.224,31.299 67.2,32.275
  Layer 2 w0.7: v1(73.65,48.825) 73.65,47.575 75.075,46.15 78.025,46.15 86.303,37.872 v1@86.303,36.614 ; 74.65,25.075 75.819,25.075 v1(86.303,35.559)
  other v1: 41.175,18.325 41.712,18.325 42.25,18.325 42.25,18.825 60.9,19.575 61.475,19.575 62.025,19.575 60.9,20.1 61.475,20.1 62.025,20.1 60.9,20.625 61.475,20.625 62.025,20.625 74.189,24.88 74.739,24.88 74.189,25.405 74.739,25.405 73.85,25.9 73.85,26.5 73.85,27.075 65.549,28.751 66.099,28.751 65.549,29.276 86.297,36.072 86.284,36.614 31.775,48.85 32.375,48.85 73.65,49.409 73.65,49.994 73.65,50.578 73.65,51.162 73.65,51.747 73.65,52.331 73.65,52.916 34.05,58.175 34.712,58.175 35.375,58.175 36.037,58.175 34.063,58.8 34.725,58.8 35.387,58.8 36.05,58.8
BTN_AM: C121.1 DD1.N16 R107.1 XS5.6 | length 39.7
  Top Layer w0.125: R107.1@75.114,9.875 75.1,9.861 v1(75.1,9.15) 75.125,9.125 75.125,7.35 XS5.6@75.15,7.325
  Top Layer w0.25: DD1.N16@52,34.4 v1(52.4,34)
  Layer 1 w0.125: v1(52.4,34) 52.453,33.947 52.453,33.82 52.839,33.433 55.542,33.433 62.791,26.184 62.791,23.041 75.1,10.732 v1(75.1,9.15)
  Bottom Layer w0.125: v1(75.1,9.15) 75.1,9.861 C121.1@75.114,9.875
BTN_BAND3: C52.1 DD1.K16 R111.1 XS6.5 | length 52.2
  Top Layer w0.125: R111.1@85.632,9.893 85.638,9.887 v1@85.638,9.24 ; v1(85.638,9.234) 85.908,8.964 86.236,8.964 86.338,8.862 86.538,8.862 87.2,8.2 XS6.5@87.2,7.325
  Top Layer w0.25: v1(51.6,37.2) DD1.K16@52,36.8
  Layer 1 w0.125: v1(51.6,37.2) 52.467,36.333 52.754,36.333 53.05,36.037 54.871,36.037 64.141,26.768 64.141,23.658 76.385,11.415 83.457,11.415 v1(85.638,9.234)
  Bottom Layer w0.125: C52.1@85.625,9.9 85.638,9.887 v1(85.638,9.234)
BTN_BAND4: C127.1 DD1.M18 R112.1 XS6.6 | length 50
  Top Layer w0.125: R112.1@86.562,9.9 86.57,9.893 v1(86.57,9.225) 87.058,8.736 87.264,8.736 87.7,8.3 XS6.6@87.7,7.325
  Top Layer w0.25: DD1.M18@53.6,35.2 v1(54,34.8)
  Layer 1 w0.125: v1(57.3,34.375) 57.3,33.927 64.366,26.861 64.366,23.752 76.478,11.64 84.155,11.64 v1(86.57,9.225)
  Layer 2 w0.125: v1(54,34.8) 54.053,34.853 54.233,34.853 54.543,35.163 56.512,35.163 v1(57.3,34.375)
  Bottom Layer w0.125: C127.1@86.562,9.9 86.57,9.893 v1(86.57,9.225)
BTN_BAND5: C129.1 DD1.M17 R113.1 XS6.7 | length 52.5
  Top Layer w0.125: R113.1@87.5,9.9 87.507,9.893 v1(87.507,9.225) 87.507,8.878 88.196,8.189 88.196,7.329 XS6.7@88.2,7.325
  Top Layer w0.25: DD1.M17@52.8,35.2 v1(53.2,34.8)
  Layer 1 w0.125: v1(57.712,34.658) 57.765,34.606 57.765,34.274 57.937,34.101 57.937,33.608 64.591,26.954 64.591,23.845 76.571,11.865 84.867,11.865 v1(87.507,9.225)
  Layer 2 w0.125: v1(53.2,34.8) 53.57,35.17 54.128,35.17 54.4,35.442 54.4,35.713 54.65,35.963 54.95,35.963 56.463,35.962 57.712,34.713 v1(57.712,34.658)
  Bottom Layer w0.125: C129.1@87.5,9.9 87.507,9.893 v1(87.507,9.225)
BTN_BAND6: C130.1 DD1.K18 R114.1 XS6.8 | length 53.3
  Top Layer w0.125: R114.1@88.437,9.9 88.445,9.893 v1(88.445,9.225) 88.445,8.63 88.7,8.375 XS6.8@88.7,7.325
  Top Layer w0.25: v1(53.2,36.4) DD1.K18@53.6,36.8
  Layer 1 w0.125: v1(55.775,36.825) 56.175,36.825 58.234,34.766 58.234,33.629 64.816,27.047 64.816,23.938 76.664,12.09 85.58,12.09 v1(88.445,9.225)
  Layer 2 w0.125: v1(53.2,36.4) 53.625,36.825 v1(55.775,36.825)
  Bottom Layer w0.125: C130.1@88.437,9.9 88.445,9.893 v1(88.445,9.225)
BTN_BAND7: C132.1 DD1.K17 R115.1 XS6.9 | length 55.4
  Top Layer w0.125: XS6.9@89.2,7.325 89.2,8.375 89.382,8.557 v1(89.382,9.225) 89.382,9.893 R115.1@89.375,9.9
  Top Layer w0.25: v1(52.4,37.2) DD1.K17@52.8,36.8
  Layer 1 w0.125: v1(55.8,37.35) 56.1,37.05 56.4,37.05 58.459,34.991 58.459,33.723 65.041,27.141 65.041,24.031 76.758,12.315 86.292,12.315 v1(89.382,9.225)
  Layer 2 w0.125: v1(52.4,37.2) 52.796,37.596 55.048,37.596 55.294,37.35 v1(55.8,37.35)
  Bottom Layer w0.125: C132.1@89.375,9.9 89.382,9.893 v1(89.382,9.225)
BTN_CW: C120.1 DD1.M15 R104.1 XS5.5 | length 40.8
  Top Layer w0.125: R104.1@74.136,9.875 74.125,9.864 v1(74.125,9.175) 74.375,9.175 74.65,8.9 XS5.5@74.65,7.325
  Top Layer w0.25: DD1.M15@51.2,35.2 v1(51.6,34.8)
  Layer 1 w0.125: v1(51.6,34.8) 51.962,34.438 51.962,33.863 52.617,33.208 55.449,33.208 62.566,26.091 62.566,22.947 74.125,11.388 v1(74.125,9.175)
  Bottom Layer w0.125: v1(74.125,9.175) 74.125,9.864 C120.1@74.136,9.875
BTN_DIG: C122.1 DD1.L14 R108.1 XS5.7 | length 42.7
  Top Layer w0.125: XS5.7@75.65,7.325 75.65,8.75 v1(76.1,9.2) 76.1,9.868 R108.1@76.093,9.875
  Top Layer w0.25: DD1.L14@50.4,36 v1(50.8,35.6)
  Layer 1 w0.125: v1(50.8,35.6) 51.15,35.25 51.708,35.25 52.762,34.195 52.762,33.893 52.998,33.658 55.635,33.658 63.016,26.277 63.016,23.134 76.1,10.05 v1(76.1,9.2)
  Bottom Layer w0.125: C122.1@76.093,9.875 76.1,9.868 v1(76.1,9.2)
BTN_FM: C117.1 DD1.N15 R102.1 XS5.4 | length 39.7
  Top Layer w0.125: R102.1@73.157,9.925 73.2,9.882 v1(73.2,9.275) 73.512,9.275 74.15,8.637 XS5.4@74.15,7.325
  Top Layer w0.25: DD1.N15@51.2,34.4 v1(51.6,34)
  Layer 1 w0.125: v1@51.604,33.996 51.604,33.922 51.737,33.788 51.737,33.77 52.524,32.983 55.356,32.983 62.341,25.998 62.341,22.854 73.2,11.995 v1(73.2,9.275)
  Bottom Layer w0.125: C117.1@73.157,9.875 73.2,9.832 v1(73.2,9.275)
BTN_LSB: C123.1 DD1.K14 R110.1 XS5.8 | length 43.7
  Top Layer w0.125: XS5.8@76.15,7.325 76.15,8.275 v1(77.075,9.2) 77.075,9.871 R110.1@77.071,9.875
  Top Layer w0.25: DD1.K14@50.4,36.8 v1(50.8,36.4)
  Layer 1 w0.125: v1(50.8,36.4) 51.598,35.602 51.798,35.602 53.008,34.392 54.95,34.392 54.955,34.387 55.249,34.387 63.241,26.395 63.241,23.227 76.325,10.143 76.325,9.95 v1(77.075,9.2)
  Bottom Layer w0.125: C123.1@77.071,9.875 77.075,9.871 v1(77.075,9.2)
BTN_TUNE: C116.1 DD1.M14 R100.1 XS5.3 | length 40.8
  Top Layer w0.125: R100.1@72.179,9.875 72.175,9.871 v1(72.175,9.275) 72.687,9.275 73.65,8.312 XS5.3@73.65,7.325
  Top Layer w0.25: DD1.M14@50.4,35.2 v1(50.8,34.8)
  Layer 1 w0.125: v1(50.8,34.8) 51.195,34.405 51.195,33.775 52.212,32.758 55.262,32.758 62.116,25.904 62.116,22.752 72.175,12.693 v1(72.175,9.275)
  Bottom Layer w0.125: v1(72.175,9.275) 72.175,9.871 C116.1@72.179,9.875
BTN_USB: C114.1 DD1.L16 R99.1 XS5.9 | length 44.3
  Top Layer w0.125: XS5.9@76.65,7.325 76.65,8.263 77.083,8.696 77.645,8.696 78.05,9.101 v1(78.05,9.175) R99.1@78.05,9.875
  Top Layer w0.25: v1(51.6,36.4) DD1.L16@52,36
  Layer 1 w0.125: v1(51.6,36.4) 51.6,36.375 51.95,36.025 52.6,36.025 53.462,35.163 55.11,35.163 63.691,26.581 63.691,23.413 76.149,10.956 76.269,10.956 v1(78.05,9.175)
  Bottom Layer w0.125: v1(78.05,9.175) C114.1@78.05,9.875
CW_DASH: C126.1 DD1.C17 R20.1 VD6.1 | length 86.1
  Top Layer w0.125: VD6.1@17.8,11.35 17.775,11.375 R20.1@17.775,12.425 C126.1@18.575,12.425
  Top Layer w0.2: C126.1@18.575,12.425 v1@18.575,13.15
  Top Layer w0.25: v1(52.4,42.8) DD1.C17@52.8,42.4
  Layer 1 w0.125: v1(18.572,13.168) 17.025,14.715 17.025,16.8 21.925,21.7 21.925,49.795 27.28,55.15 49.831,55.15 51.267,53.714 51.267,53.193 v1(51.274,53.187)
  Layer 2 w0.125: v1(51.274,53.187) 51.25,53.163 51.25,52.8 51.138,52.688 51.138,44.575 52.018,43.695 52.018,43.182 v1(52.4,42.8)
CW_DOT: C125.1 DD1.A16 R117.1 VD7.1 | length 82.9
  Top Layer w0.2: VD7.1@21.2,11.35 21.225,11.375 C125.1@21.225,12.425 R117.1@22,12.425 v1@22,13.15
  Top Layer w0.25: v1(51.6,43.6) DD1.A16@52,44
  Layer 1 w0.125: v1(21.997,13.168) 23.75,14.921 23.75,19.464 22.15,21.064 22.15,49.702 27.373,54.925 49.668,54.925 50.775,53.818 50.775,53.277 v1(50.781,53.271)
  Layer 2 w0.125: v1(50.781,53.271) 50.775,53.266 50.775,44.425 v1(51.6,43.6)
CW_KEY: DD1.A19 XS4.8 | length 49.1
  Top Layer w0.125: v1@93.425,46.25 XS4.8@95.05,46.25
  Top Layer w0.25: DD1.A19@54.4,44 v1(54.8,43.6)
  Layer 1 w0.125: v1(58.775,48.55) 58.8,48.575 68.3,48.575 69.275,47.6 73.69,47.6 74.66,46.63 84.64,46.63 85.435,47.425 90.361,47.425 92.884,44.903 93.703,44.903 93.875,45.075 93.875,45.407 93.423,45.859 v1(93.423,46.265)
  Layer 2 w0.125: v1(54.8,43.6) 57.425,43.6 58.8,44.975 58.8,48.525 v1(58.775,48.55)
DDR_1V35: C71.2 C72.2 C73.2 C74.2 C75.2 C76.2 C77.2 C78.2 C80.2 C81.2 C82.2 C83.2 C84.2 C85.2 C86.2 C87.2 C90.2 C91.2 DD1.A3 DD1.D2 DD1.E5 DD1.G1 DD1.H4 DD1.L3 DD1.P2 DD1.R5 DD1.U1 DD1.V4 DD2.A1 DD2.A8 DD2.B2 DD2.C1 DD2.C9 DD2.D2 DD2.D9 DD2.E9 DD2.F1 DD2.G7 DD2.H2 DD2.H9 DD2.K2 DD2.K8 DD2.N1 DD2.N9 DD2.R1 DD2.R9 L9.1 R69.2 R71.1 R73.1 R74.2 | length 119.6
  Top Layer w0.125: DD2.K8@32.6,36.8 32.972,36.427 33.797,36.427 v1(34.15,36.075) ; DD2.C9@33.4,42.4 34.05,42.4 34.45,42 v1(34.45,41.982) ; v1(39.5,33.2) 40.4,33.2 DD1.P2@40.8,33.6
  Top Layer w0.25: v1(26.6,33.2) DD2.R1@27,32.8 ; v1(26.6,34) DD2.N1@27,34.4 ; v1(26.613,40.387) DD2.F1@27,40 DD2.F1@27.013,39.987 ; v1(26.613,42.787) DD2.C1@27,42.4 DD2.C1@27.013,42.387 ; DD2.A1@27,44 v1(27.4,43.6) ; v1(27.4,36.4) DD2.K2@27.8,36.8 ; v1(27.4,41.2) DD2.D2@27.8,41.6 ; v1(27.4,42.8) DD2.B2@27.8,43.2 ; DD2.H2@27.8,38.4 v1(28.2,38) ; v1(31.4,38.8) DD2.G7@31.8,39.2 ; DD2.A8@32.6,44 32.6,44.023 32.951,44.374 v1(32.951,44.397) ; R71.1@32.675,53.725 32.708,53.692 33.196,53.692 v1(33.225,53.663) ; v1(33,34.8) DD2.N9@33.4,34.4 ; DD2.R9@33.4,32.8 v1(33.8,33.2) ; DD2.H9@33.4,38.4 v1(34,38.4) ; DD2.E9@33.4,40.8 33.412,40.8 33.771,40.442 v1(33.783,40.442) ; DD2.D9@33.4,41.6 33.409,41.6 33.791,41.982 v1(33.8,41.982) ; v1(39.375,39.525) 39.404,39.496 39.65,39.496 39.946,39.2 DD1.G1@40,39.2 ; DD1.U1@40,31.2 v1(40.4,31.6) ; DD1.D2@40.8,41.6 v1(41.2,41.2) ; v1(40.95,50) 41.25,49.7 R74.2@41.25,49.2 R73.1@42.15,49.2 ; v1(41.2,35.6) DD1.L3@41.6,36 ; v1(41.207,44.421) 41.207,44.407 41.6,44.014 DD1.A3@41.6,44 ; v1(42,38) DD1.H4@42.4,38.4 ; DD1.V4@42.4,30.4 v1(42.8,30.8) ; v1(42.8,32.4) DD1.R5@43.2,32.8 ; v1(42.8,41.2) DD1.E5@43.2,40.8
  Layer 2 w0.25: v1(28.141,46.3) 28.283,46.3 28.358,46.375 28.358,50.133 31.888,53.663 v1(33.225,53.663) ; v1(39.5,46.949) 39.55,46.999 39.55,48.6 v1(40.95,50)
  Layer 2 w0.5: v1@29.526,45.945 30.18,45.945 31,45.125 40.503,45.125 v1(41.207,44.421)
  Bottom Layer w0.2: v1(26.6,34) 27,34.4 27.566,34.4 27.8,34.634 27.8,34.966 27.8,36.4
  Bottom Layer w0.25: C72.2@33.356,32.532 33.375,32.551 33.375,32.825 33.384,32.825 33.759,33.2 v1(33.8,33.2) ; 39.375,40.8 39.4,40.775 40.775,40.775 v1(41.2,41.2) 41.241,41.2 41.616,40.825 42.384,40.825 42.759,41.2 v1(42.8,41.2) ; 39.7,38.553 39.878,38.375 40.854,38.375 40.904,38.425 41.575,38.425 v1(42,38)
  Bottom Layer w0.4: v1(26.6,33.2) v1(26.6,34) ; v1(26.613,40.387) 27.4,41.174 v1(27.4,41.2) 27.9,41.2 ; v1(26.613,42.787) 26.626,42.8 v1(27.4,42.8) ; v1(27.4,36.4) 27.8,36.4 28.107,36.4 28.788,37.081 28.788,37.412 v1(28.2,38) 28.2,38.859 27.58,39.479 27.58,39.873 27.9,40.193 27.9,41.2 ; v1(32.951,44.397) 32.941,44.387 30.9,44.387 ; C74.2@33,34.175 v1(33,34.8) 33.575,35.375 33.575,35.5 v1(34.15,36.075) 33.925,36.3 33.793,36.3 32.9,37.193 32.9,38.4 ; C74.2@33.13,34.175 33.17,34.135 33.17,34.105 33.8,33.475 v1(33.8,33.2) ; v1(33.783,40.442) 33.78,40.445 33.78,40.628 33.786,40.634 C77.2@33.786,41.2 ; v1(34,38.4) 32.9,38.4 ; v1(34.45,41.982) v1(33.8,41.982) 33.786,41.968 C77.2@33.786,41.2 ; v1(27.4,42.8) 27.9,42.3 27.9,41.2 ; v1(27.4,42.8) v1(27.4,43.6) 27.429,43.629 27.429,44.347 27.469,44.387 30.9,44.387 ; 30.9,44.387 30.9,41.793 31.493,41.2 31.8,41.2 ; 31.8,41.2 31.8,39.2 v1(31.4,38.8) 31.8,38.4 32.9,38.4 ; 31.8,41.2 C77.2@33.786,41.2
  Bottom Layer w0.5: v1(39.5,33.2) 39.5,34.267 39.7,34.467 39.7,35.212 ; 39.75,45.565 39.75,44.421 ; v1(40.4,31.6) 39.5,32.5 39.5,33 39.7,33.2 41.006,33.2 41.806,32.4 v1(42.8,32.4) v1(42.8,30.8) ; v1(41.2,35.6) 41.178,35.6 40.628,35.05 39.863,35.05 39.7,35.212 ; v1(41.207,44.421) 39.75,44.421 ; 39.7,35.212 39.7,38.553 39.375,38.878 v1(39.375,39.525) 39.375,40.8 39.375,41.562 39.75,41.937 39.75,44.421
  other v1: 39.5,45.565 40.025,45.566 27.45,45.775 28.142,45.775 28.834,45.775 29.526,45.775 39.5,46.257 40.025,46.258 27.449,46.3 28.833,46.3 29.525,46.3 40.025,46.95
DDR_A0: DD1.N2 DD2.N3 | length 20.9
  Top Layer w0.25: DD2.N3@28.6,34.4 v1(29,34.8) ; v1(40.4,34) DD1.N2@40.8,34.4
  Layer 1 w0.125: v1(29,34.8) 29.24,35.04 29.302,35.102 ccw(c29.152,35.253) 29.365,35.253 29.365,35.899 cw(c29.49,35.899) 29.615,35.899 29.615,35.136 ccw(c29.74,35.136) 29.865,35.136 29.865,35.612 cw(c29.99,35.612) 30.115,35.612 30.115,35.136 ccw(c30.24,35.136) 30.365,35.136 30.365,35.612 cw(c30.49,35.612) 30.615,35.612 30.615,35.136 ccw(c30.74,35.136) 30.865,35.136 30.865,35.612 cw(c30.99,35.612) 31.115,35.612 31.115,35.136 ccw(c31.24,35.136) 31.365,35.136 31.365,35.612 cw(c31.49,35.612) 31.615,35.612 31.615,35.325 ccw(c31.74,35.325) 31.74,35.2 33.74,35.2 ccw(c33.74,35.325) 33.865,35.325 33.865,35.362 cw(c33.99,35.362) 34.115,35.362 34.115,35.325 ccw(c34.24,35.325) 34.24,35.2 34.659,35.2 34.717,35.142 34.756,35.104 34.8,35.059 34.977,34.883 cw(c34.888,34.794) 34.977,34.706 34.749,34.478 ccw(c34.837,34.389) 34.749,34.301 ccw(c34.837,34.389) 34.926,34.301 35.154,34.529 cw(c35.242,34.441) 35.33,34.529 35.827,34.032 35.859,34 35.884,34 v1(40.4,34)
DDR_A1: DD1.K2 DD2.P7 | length 24.7
  Top Layer w0.125: DD2.P7@31.8,33.6 32.202,34.002 34.167,34.002 34.277,34.002 34.532,34.256 cw(c34.62,34.168) 34.708,34.256 35.143,33.822 ccw(c35.231,33.91) 35.32,33.822 ccw(c35.231,33.91) 35.32,33.998 34.83,34.489 cw(c34.918,34.577) 34.83,34.665 cw(c34.918,34.577) 35.006,34.665 35.497,34.175 ccw(c35.585,34.264) 35.673,34.175 ccw(c35.585,34.264) 35.673,34.352 35.183,34.842 cw(c35.272,34.93) 35.183,35.019 cw(c35.272,34.93) 35.36,35.019 35.85,34.529 ccw(c35.939,34.617) 36.027,34.529 ccw(c35.939,34.617) 36.027,34.705 35.537,35.196 cw(c35.625,35.284) 35.537,35.372 cw(c35.625,35.284) 35.714,35.372 36.204,34.882 ccw(c36.292,34.971) 36.381,34.882 ccw(c36.292,34.971) 36.381,35.059 35.891,35.549 cw(c35.979,35.637) 35.891,35.726 cw(c35.979,35.637) 36.067,35.726 36.557,35.236 ccw(c36.646,35.324) 36.734,35.236 ccw(c36.646,35.324) 36.734,35.413 36.244,35.902 cw(c36.333,35.991) 36.244,36.079 cw(c36.333,35.991) 36.421,36.079 36.911,35.589 ccw(c36.999,35.678) 37.088,35.589 ccw(c36.999,35.678) 37.088,35.766 36.598,36.256 cw(c36.686,36.344) 36.598,36.433 cw(c36.686,36.344) 36.775,36.433 37.264,35.943 ccw(c37.353,36.031) 37.441,35.943 ccw(c37.353,36.031) 37.441,36.12 36.952,36.609 cw(c37.04,36.698) 36.952,36.786 cw(c37.04,36.698) 37.128,36.786 37.519,36.396 ccw(c37.607,36.484) 37.696,36.396 ccw(c37.607,36.484) 37.696,36.572 37.361,36.907 cw(c37.449,36.995) 37.361,37.084 37.452,37.175 37.465,37.187 38.08,37.187 40.412,37.187 DD1.K2@40.8,36.8
  Top Layer w0.25: DD2.P7@31.8,33.6 32.2,34 ; 40.4,37.2 40.412,37.187 DD1.K2@40.8,36.8
DDR_A2: DD1.M3 DD2.P3 | length 23.6
  Top Layer w0.125: DD2.P3@28.6,33.6 28.607,33.6 29,33.6 29.334,33.266 cw(c29.246,33.178) 29.334,33.089 29.061,32.816 ccw(c29.149,32.728) 29.061,32.64 ccw(c29.149,32.728) 29.238,32.64 29.511,32.913 cw(c29.599,32.825) 29.688,32.913 cw(c29.599,32.825) 29.688,32.736 29.078,32.127 ccw(c29.167,32.038) 29.078,31.95 ccw(c29.167,32.038) 29.255,31.95 29.865,32.559 cw(c29.953,32.471) 30.041,32.559 cw(c29.953,32.471) 30.041,32.383 29.699,32.04 ccw(c29.787,31.952) 29.699,31.863 ccw(c29.787,31.952) 29.876,31.863 30.218,32.205 cw(c30.306,32.117) 30.395,32.205 30.968,31.632 31.013,31.587 31.238,31.362 35.572,31.362 35.616,31.407 ccw(c35.528,31.495) 35.616,31.583 35.422,31.777 cw(c35.511,31.866) 35.422,31.954 cw(c35.511,31.866) 35.599,31.954 36.029,31.524 ccw(c36.117,31.612) 36.206,31.524 ccw(c36.117,31.612) 36.206,31.701 35.776,32.131 cw(c35.864,32.219) 35.776,32.308 cw(c35.864,32.219) 35.953,32.308 36.383,31.878 ccw(c36.471,31.966) 36.559,31.878 ccw(c36.471,31.966) 36.559,32.054 36.164,32.45 cw(c36.252,32.539) 36.164,32.627 cw(c36.252,32.539) 36.34,32.627 36.5,32.467 ccw(c36.588,32.556) 36.677,32.467 38.997,34.787 41.187,34.787
  Top Layer w0.25: 41.2,34.8 DD1.M3@41.6,35.2
DDR_A3: DD1.K3 DD2.N2 | length 21.2
  Top Layer w0.25: DD2.N2@27.8,34.4 v1(28.2,34.8) ; v1(41.2,36.4) DD1.K3@41.6,36.8
  Layer 2 w0.125: v1(28.2,34.8) 28.563,34.437 28.637,34.437 29.7,34.437 ccw(c29.7,34.562) 29.825,34.562 29.825,34.887 cw(c29.95,34.887) 30.075,34.887 30.075,34.562 ccw(c30.2,34.562) 30.325,34.562 30.325,34.887 cw(c30.45,34.887) 30.575,34.887 30.575,34.562 ccw(c30.7,34.562) 30.825,34.562 30.825,34.887 cw(c30.95,34.887) 31.075,34.887 31.075,34.562 ccw(c31.2,34.562) 31.325,34.562 31.325,34.887 cw(c31.45,34.887) 31.575,34.887 31.575,34.562 ccw(c31.7,34.562) 31.7,34.437 32.4,34.437 33.97,34.437 34.066,34.534 34.464,34.931 ccw(c34.376,35.02) 34.464,35.108 34.125,35.447 cw(c34.213,35.536) 34.125,35.624 cw(c34.213,35.536) 34.302,35.624 34.641,35.285 ccw(c34.729,35.373) 34.818,35.285 ccw(c34.729,35.373) 34.818,35.462 34.522,35.757 cw(c34.61,35.846) 34.522,35.934 cw(c34.61,35.846) 34.699,35.934 34.994,35.638 ccw(c35.083,35.727) 35.171,35.638 35.495,35.963 40.55,35.963 40.945,36.357 41.157,36.357 v1(41.2,36.4)
DDR_A4: DD1.M4 DD2.P8 | length 22.3
  Top Layer w0.25: DD2.P8@32.6,33.6 v1(33,33.2) ; DD1.M4@42.4,35.2 v1(42.8,34.8)
  Layer 1 w0.125: v1(33,33.2) 33.356,32.844 33.588,32.612 34.044,32.612 ccw(c34.044,32.737) 34.169,32.737 cw(c34.294,32.737) 34.419,32.737 34.419,31.995 ccw(c34.544,31.995) 34.669,31.995 34.669,32.781 cw(c34.794,32.781) 34.919,32.781 34.919,31.995 ccw(c35.044,31.995) 35.169,31.995 35.169,33.088 cw(c35.294,33.088) 35.419,33.088 35.419,31.995 ccw(c35.544,31.995) 35.669,31.995 35.669,32.588 cw(c35.794,32.588) 35.919,32.588 35.919,31.995 ccw(c36.044,31.995) 36.169,31.995 36.169,32.487 cw(c36.294,32.487) 36.419,32.487 36.419,32.041 ccw(c36.544,32.041) 36.669,32.041 36.669,32.487 cw(c36.794,32.487) 36.794,32.612 37.092,32.612 42.5,32.612 42.65,32.762 42.908,32.762 43.163,33.017 43.163,34.263 42.853,34.573 42.853,34.747 v1(42.8,34.8)
DDR_A5: DD1.L1 DD2.P2 | length 23.2
  Top Layer w0.125: DD2.P2@27.8,33.6 28.173,33.972 28.946,33.972 28.959,33.959 29.003,33.915 ccw(c29.092,34.003) 29.18,33.915 29.588,34.323 cw(c29.677,34.235) 29.765,34.323 cw(c29.677,34.235) 29.765,34.146 29.357,33.738 ccw(c29.445,33.65) 29.357,33.561 ccw(c29.445,33.65) 29.534,33.561 29.942,33.97 cw(c30.03,33.881) 30.119,33.97 cw(c30.03,33.881) 30.119,33.793 29.71,33.385 ccw(c29.799,33.296) 29.71,33.208 ccw(c29.799,33.296) 29.887,33.208 30.295,33.616 cw(c30.384,33.528) 30.472,33.616 cw(c30.384,33.528) 30.472,33.439 30.064,33.031 ccw(c30.152,32.943) 30.064,32.854 ccw(c30.152,32.943) 30.241,32.854 30.649,33.262 cw(c30.737,33.174) 30.826,33.262 cw(c30.737,33.174) 30.826,33.086 30.418,32.677 ccw(c30.506,32.589) 30.418,32.501 ccw(c30.506,32.589) 30.594,32.501 31.003,32.909 cw(c31.091,32.821) 31.179,32.909 cw(c31.091,32.821) 31.179,32.732 30.771,32.324 ccw(c30.859,32.235) 30.771,32.147 ccw(c30.859,32.235) 30.948,32.147 30.956,32.155 cw(c31.044,32.067) 31.132,32.155 cw(c31.044,32.067) 31.132,31.978 31.125,31.97 ccw(c31.213,31.882) 31.125,31.794 31.287,31.632 31.331,31.587 34.737,31.587 39.15,36 39.4,36
  Top Layer w0.25: DD2.P2@27.8,33.6 28.2,34 ; 39.4,36 DD1.L1@40,36
DDR_A6: DD1.L4 DD2.R8 | length 22.3
  Top Layer w0.25: v1(32.2,33.2) DD2.R8@32.6,32.8 ; v1(41.944,35.6) 41.972,35.6 42.372,36 DD1.L4@42.4,36
  Layer 1 w0.125: v1(32.2,33.2) 32.6,32.8 32.6,32.387 33.342,31.645 36.9,31.645 36.963,31.645 ccw(c36.963,31.77) 37.088,31.77 37.088,32.262 cw(c37.213,32.262) 37.338,32.262 37.338,31.709 ccw(c37.463,31.709) 37.588,31.709 37.588,32.262 cw(c37.713,32.262) 37.838,32.262 37.838,31.709 ccw(c37.963,31.709) 38.088,31.709 38.088,32.202 cw(c38.213,32.202) 38.338,32.202 38.338,31.77 ccw(c38.463,31.77) 38.463,31.645 39.642,31.645 39.67,31.645 40.063,32.037 42.95,32.037 43.219,32.306 43.219,32.603 43.487,32.872 43.487,33.237 43.963,33.713 43.963,34.15 43.739,34.374 43.399,34.374 43.176,34.598 43.176,34.937 42.901,35.211 42.389,35.211 42,35.6 v1(41.944,35.6)
DDR_A7: DD1.K4 DD2.R2 | length 22
  Top Layer w0.25: v1(27.4,33.2) DD2.R2@27.8,32.8 ; v1(41.944,36.4) 41.972,36.4 42.372,36.8 DD1.K4@42.4,36.8
  Layer 2 w0.125: v1(27.4,33.2) 27.975,33.775 cw(c28.063,33.686) 28.151,33.775 28.215,33.71 ccw(c28.304,33.799) 28.392,33.71 ccw(c28.304,33.799) 28.392,33.887 28.107,34.172 cw(c28.195,34.261) 28.107,34.349 cw(c28.195,34.261) 28.284,34.349 28.384,34.249 ccw(c28.472,34.337) 28.472,34.212 29.075,34.212 34.063,34.212 35.161,35.31 35.323,35.472 cw(c35.411,35.383) 35.536,35.383 35.536,35.15 ccw(c35.661,35.15) 35.786,35.15 35.786,35.612 cw(c35.911,35.612) 36.036,35.612 36.036,35.15 ccw(c36.161,35.15) 36.286,35.15 36.286,35.612 cw(c36.411,35.612) 36.536,35.612 36.536,35.281 ccw(c36.661,35.281) 36.786,35.281 36.786,35.6 cw(c36.911,35.6) 37.036,35.6 37.036,35.475 ccw(c37.161,35.475) 37.286,35.475 cw(c37.411,35.475) 37.411,35.6 39.7,35.6 39.725,35.6 40.088,35.237 40.55,35.237 40.8,35.487 40.8,35.713 41.083,35.995 41.375,35.995 41.727,36.347 41.891,36.347 v1(41.944,36.4)
DDR_A8: DD1.K1 DD2.T8 | length 23.6
  Top Layer w0.125: 33.004,32.404 34.171,32.404 34.404,32.404 34.597,32.597 cw(c34.685,32.508) 34.774,32.597 35.013,32.358 ccw(c35.101,32.446) 35.19,32.358 ccw(c35.101,32.446) 35.19,32.535 34.859,32.865 cw(c34.947,32.954) 34.859,33.042 cw(c34.947,32.954) 35.035,33.042 35.366,32.711 ccw(c35.455,32.8) 35.543,32.711 ccw(c35.455,32.8) 35.543,32.888 35.212,33.219 cw(c35.301,33.307) 35.212,33.396 cw(c35.301,33.307) 35.389,33.396 35.72,33.065 ccw(c35.808,33.153) 35.897,33.065 ccw(c35.808,33.153) 35.897,33.242 35.566,33.573 cw(c35.654,33.661) 35.566,33.749 cw(c35.654,33.661) 35.743,33.749 36.073,33.418 ccw(c36.162,33.507) 36.25,33.418 ccw(c36.162,33.507) 36.25,33.595 35.919,33.926 cw(c36.008,34.014) 35.919,34.103 cw(c36.008,34.014) 36.096,34.103 36.427,33.772 ccw(c36.515,33.86) 36.604,33.772 ccw(c36.515,33.86) 36.604,33.949 36.273,34.28 cw(c36.361,34.368) 36.273,34.456 cw(c36.361,34.368) 36.45,34.456 36.781,34.126 ccw(c36.869,34.214) 36.957,34.126 ccw(c36.869,34.214) 36.957,34.302 36.626,34.633 cw(c36.715,34.722) 36.626,34.81 cw(c36.715,34.722) 36.803,34.81 37.134,34.479 ccw(c37.222,34.567) 37.311,34.479 ccw(c37.222,34.567) 37.311,34.656 36.98,34.987 cw(c37.068,35.075) 36.98,35.164 cw(c37.068,35.075) 37.157,35.164 37.488,34.833 ccw(c37.576,34.921) 37.664,34.833 ccw(c37.576,34.921) 37.664,35.009 37.334,35.34 cw(c37.422,35.429) 37.334,35.517 cw(c37.422,35.429) 37.51,35.517 37.841,35.186 ccw(c37.93,35.275) 38.018,35.186 ccw(c37.93,35.275) 38.018,35.363 37.687,35.694 cw(c37.776,35.782) 37.687,35.871 cw(c37.776,35.782) 37.864,35.871 38.195,35.54 ccw(c38.283,35.628) 38.372,35.54 ccw(c38.283,35.628) 38.372,35.717 38.041,36.047 cw(c38.129,36.136) 38.041,36.224 cw(c38.129,36.136) 38.217,36.224 38.548,35.893 ccw(c38.637,35.982) 38.725,35.893 ccw(c38.637,35.982) 38.725,36.07 38.394,36.401 cw(c38.483,36.489) 38.394,36.578 cw(c38.483,36.489) 38.571,36.578 38.885,36.264 ccw(c38.973,36.352) 39.061,36.264 ccw(c38.973,36.352) 39.061,36.441 38.916,36.587 cw(c39.004,36.675) 39.004,36.8 39.23,36.8 39.4,36.8
  Top Layer w0.25: DD2.T8@32.6,32 33,32.4 ; 39.4,36.8 DD1.K1@40,36.8
DDR_A9: DD1.J4 DD2.R3 | length 21
  Top Layer w0.25: v1(28.2,33.2) DD2.R3@28.6,32.8 ; v1(42,37.15) 42,37.175 42.4,37.575 DD1.J4@42.4,37.6
  Layer 2 w0.125: v1(28.2,33.2) 28.987,33.987 34.157,33.987 34.969,34.8 36.618,34.8 37.18,34.8 ccw(c37.18,34.925) 37.305,34.925 37.305,35.026 cw(c37.43,35.026) 37.555,35.026 37.555,34.75 ccw(c37.68,34.75) 37.805,34.75 37.805,35.25 cw(c37.93,35.25) 38.055,35.25 38.055,34.75 ccw(c38.18,34.75) 38.305,34.75 38.305,35.25 cw(c38.43,35.25) 38.555,35.25 38.555,34.925 ccw(c38.68,34.925) 38.68,34.8 38.997,34.8 40.913,34.8 41.563,35.45 41.563,35.731 41.794,35.963 42.181,35.963 42.428,36.209 42.428,36.772 42.05,37.15 v1(42,37.15)
DDR_A10: DD1.F5 DD2.L7 | length 22
  Top Layer w0.25: DD2.L7@31.8,36 v1(32.2,36.4) ; v1(42.8,40.4) DD1.F5@43.2,40
  Layer 2 w0.125: v1(32.2,36.4) 32.831,36.4 33.594,37.162 33.678,37.162 34.491,37.162 cw(c34.491,37.037) 34.616,37.037 34.616,36.776 ccw(c34.741,36.776) 34.866,36.776 34.866,37.253 cw(c34.991,37.253) 35.116,37.253 35.116,36.65 ccw(c35.241,36.65) 35.366,36.65 35.366,38.291 cw(c35.491,38.291) 35.616,38.291 35.616,36.65 ccw(c35.741,36.65) 35.866,36.65 35.866,37.663 cw(c35.991,37.663) 36.116,37.663 36.116,37.037 ccw(c36.241,37.037) 36.366,37.037 cw(c36.491,37.037) 36.491,37.162 36.763,37.162 37.125,36.8 39.695,36.8 40.495,37.6 41.313,37.6 41.563,37.85 41.563,38.875 41.912,39.224 42.137,39.224 42.411,39.499 42.411,40.011 v1(42.8,40.4)
DDR_A11: DD1.G4 DD2.R7 | length 21.9
  Top Layer w0.25: v1(31.4,32.4) DD2.R7@31.8,32.8 ; DD1.G4@42.4,39.2 v1(42.8,38.8)
  Layer 2 w0.125: v1(31.4,32.4) 31.8,32.8 34.8,32.8 35.6,33.6 38.306,33.6 38.369,33.6 ccw(c38.369,33.725) 38.494,33.725 38.494,34.05 cw(c38.619,34.05) 38.744,34.05 38.744,33.187 ccw(c38.869,33.187) 38.994,33.187 38.994,34.05 cw(c39.119,34.05) 39.244,34.05 39.244,33.687 ccw(c39.369,33.687) 39.494,33.687 39.494,34.05 cw(c39.619,34.05) 39.744,34.05 39.744,33.725 ccw(c39.869,33.725) 39.869,33.6 40.375,33.6 41.313,33.6 41.609,33.897 41.609,34.122 41.869,34.381 42.094,34.381 42.4,34.687 42.4,34.913 42.65,35.163 42.875,35.163 43.163,35.45 43.163,36.2 43.213,36.25 43.213,36.55 43.163,36.6 43.163,38.192 42.826,38.528 42.826,38.774 v1(42.8,38.8)
DDR_A12: DD1.E4 DD2.N7 | length 22.3
  Top Layer w0.125: v1(30.671,36.588) 30.671,35.529 31.4,34.8
  Top Layer w0.25: 31.4,34.8 DD2.N7@31.8,34.4 ; v1(42,40.4) DD1.E4@42.4,40.8
  Layer 1 w0.125: v1(30.671,36.588) 30.671,37.15 ccw(c30.546,37.15) 30.546,37.275 29.395,37.275 cw(c29.395,37.4) 29.395,37.525 30.687,37.525 ccw(c30.687,37.65) 30.687,37.775 30.062,37.775 cw(c30.062,37.9) 30.062,38.025 30.546,38.025 ccw(c30.546,38.15) 30.671,38.15 30.671,38.707 30.671,38.846 31.056,39.231 31.794,39.231 32.262,38.763 35.072,38.763 35.472,39.162 41.275,39.162 41.601,39.488 41.601,39.744 41.98,40.122 41.98,40.38 v1(42,40.4)
DDR_A13: DD1.D4 DD2.T3 | length 23.8
  Top Layer w0.25: v1(28.2,32.4) DD2.T3@28.6,32 ; v1(42,42) DD1.D4@42.4,41.6
  Layer 1 w0.125: v1(28.2,32.4) 27.8,32.8 27.8,35.2 27.014,35.986 27.014,37.376 27.275,37.638 27.55,37.638 27.837,37.925 27.837,38.15 28.556,38.869 28.869,38.869 29.743,39.743 34.693,39.743 35.375,40.425 40.138,40.425 40.763,41.05 40.763,41.275 41.099,41.611 41.611,41.611 v1(42,42)
DDR_A14: DD1.F4 DD2.T7 | length 22
  Top Layer w0.25: DD2.T7@31.8,32 v1(32.2,32.4) ; DD1.F4@42.4,40 v1(42.8,39.6)